# Allegro board NightIoT_uBus_Conect_ESP8266_V100_PCB.brd
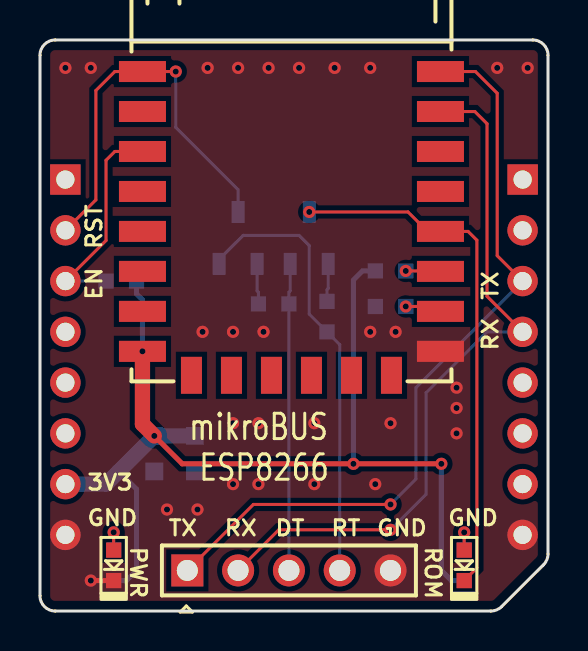
[diagram p0: board, top side]
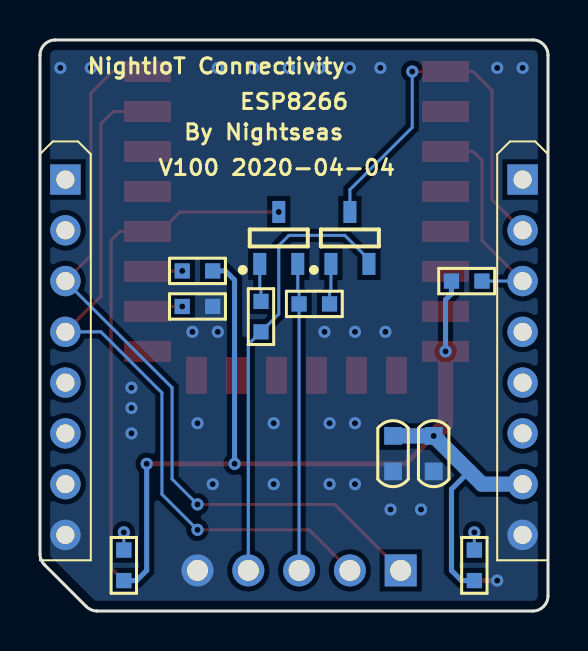
[diagram p1: board, bottom side, seen from below]

Outline 25.4 x 28.57 mm; copper layers: TOP, BOTTOM. Coordinates in mm from the lower left corner of the outline.
Outline path: 0,27.81 0,0.76 arc(0.22,0.22) 0.76,0 22.54,0 arc(22.84,0.06) 23.08,0.22 25.18,2.32 arc(25.34,2.56) 25.4,2.86 25.4,27.81 arc(25.18,28.35) 24.64,28.57 0.76,28.57 arc(0.22,28.35) 0,27.81

## Design rules (mm)
net group DTR: nets DTR N1533008
net group RTS: nets N1533004 RTS

## Placement (name value [footprint] x y rotation side)
C7  1uF  [C0603]  7.75 7.87 180 bottom
C8  0.1uF  [C0603]  5.71 7.87 180 bottom
J1  uBUS_CON_A  [SIP8]  1.27 21.59 180 bottom
J2  uBUS_CON_B  [SIP8]  24.13 21.59 180 bottom
J3  ISP CON  [SIP5]  7.37 2.03 0 top
LD2  BLUE  [LED0603]  21.21 3.05 270 top
LD3  GRN  [LED0603]  3.68 3.05 270 top
Q1  NPN_9013  [SOT23]  13.46 18.67 90 bottom
Q2  NPN_9013  [SOT23]  9.91 18.67 90 bottom
R6  10K  [R0603]  4.83 16.51 180 bottom
R7  10K  [R0603]  16.76 17.02 0 bottom
R8  10K  [R0603]  16.76 15.24 0 bottom
R9  10K  [R0603]  14.35 15.49 270 bottom
R10  1K  [R0603]  21.21 1.52 90 bottom
R11  10K  [R0603]  10.92 15.37 0 bottom
R12  560R  [R0603]  3.68 1.52 90 bottom
U3  -  [ESP12F]  12.57 23.5 0 top

## Library data of the parts
C7 = CAP_CE_0603: signal model: DEFAULT_CAPACITOR_100000pF_2_1
C8 = CAP_CE_0603: signal model: DEFAULT_CAPACITOR_47pF_2_1
J1 J2 = HEADER 8: User Part Number: ***
J3 = HEADER 5
LD2 LD3 = LED_0805
Q1 Q2 = NPN_9013
R6 R7 = R
R8 R9 = R: signal model: DEFAULT_RESISTOR_510OHM_2_1
R10-R12 = R: signal model: DEFAULT_RESISTOR_4700OHM_2_1
U3 = ESP12F

## Footprints (pads in the part's own frame, mm; a bottom-side part is the same pattern mirrored in y, then rotated)
C0603
  rect 0.889x0.889 smd: 1(0,0.889) 2(0,-0.889)
ESP12F
  rect 2.35x1.05 smd: 1(-7.45,3.5) 2(-7.45,1.5) 3(-7.45,-0.5) 4(-7.45,-2.5) 5(-7.45,-4.5) 6(-7.45,-6.5) 7(-7.45,-8.5) 8(-7.45,-10.5) 15(7.45,-10.5) 16(7.45,-8.5) 17(7.45,-6.5) 18(7.45,-4.5) 19(7.45,-2.5) 20(7.45,-0.5) 21(7.45,1.5) 22(7.45,3.5)
  rect 1.05x1.85 smd: 9(-5,-11.7) 10(-3,-11.7) 11(-1,-11.7) 12(1,-11.7) 13(3,-11.7) 14(5,-11.7)
LED0603
  rect 0.762x0.762 smd: 1(0,0) 2(1.524,0)
R0603
  rect 0.762x0.762 smd: 1(0,0) 2(1.524,0)
SIP5
  rect 1.6x1.6 hole 1.05: 1(0,0)
  round 1.6 hole 1.05: 2(2.54,0) 3(5.08,0) 4(7.62,0) 5(10.16,0)
SIP8
  rect 1.52x1.52 hole 0.91: 1(0,0)
  round 1.52 hole 0.91: 2(0,-2.54) 3(0,-5.08) 4(0,-7.62) 5(0,-10.16) 6(0,-12.7) 7(0,-15.24) 8(0,-17.78)
SOT23
  rect 1.1x0.65 smd: 1(-1.3,0.95) 2(-1.3,-0.95) 3(1.3,0)

## Nets
GND: C7.2 C8.2 J1.8 J2.8 J3.5 LD3.2(CATHODE) R8.1 U3.15(GND)
VDD3V3: C7.1 C8.1 J1.7 R6.1 R7.1 R10.1 R12.1 U3.8(VDD)
CH_PD: J1.3 R6.2 U3.3(EN)
DTR: J3.3 Q1.2(EMITTER) R11.2
IO0: LD2.2(CATHODE) Q1.3(COLLECTOR) U3.18(IO0/FLASH)
IO2: R7.2 U3.17(IO2/TXD1/SDA)
IO15: R8.2 U3.16(IO15/MTDO/HSPI_CS/RTS0/TXD2)
RST#: J1.2 Q2.3(COLLECTOR) U3.1(RST#)
RTS: J3.4 Q2.2(EMITTER) R9.2
UART_RX: J2.4 J3.2 U3.21(IO3/RXD0)
UART_TX: J2.3 J3.1 U3.22(IO1/TXD0)
N1533004: Q1.1(BASE) R9.1
N1533008: Q2.1(BASE) R11.1
N1536645: LD2.1(ANODE) R10.2
N1536681: LD3.1(ANODE) R12.2

Pads without a net: J1 1 4 5 6; J2 1 2 5 6 7; U3 2 4 5 6 7 9 10 11 12 13 14 19 20

## Via types
v1: diameter 0.61, hole 0.305, TOP to BOTTOM, 41 vias

## Routing (per net, layer and track width the routed paths; a pad name or vN(x,y) marks a point on that pad's centre or on a via; arc(x,y) is an arc through that point)
GND: length 1.1
  TOP w0.254: LD3.2 v1(2.54,1.52)
  vias: v1(1.27,27.18) v1(2.54,27.18) v1(6.35,5.08) v1(7.87,5.08) v1(8.13,13.97) v1(8.38,27.18) v1(9.65,13.97) v1(9.65,9.4) v1(9.65,6.35) v1(9.91,27.18) v1(10.92,9.4) v1(10.92,6.35) v1(11.18,13.97) v1(11.43,27.18) v1(12.95,27.18) v1(13.72,9.4) v1(13.72,6.35) v1(14.73,27.18) v1(16.51,27.18) v1(16.51,13.97) v1(16.76,6.35) v1(17.53,9.4) v1(17.78,13.97) v1(20.83,11.18) v1(20.83,10.16) v1(20.83,8.89) v1(22.86,27.18) v1(24.38,27.18)
VDD3V3: length 54.4
  TOP w0.254: v1(5.71,8.76) 7.11,7.37 v1(15.67,7.37) v1(20.07,7.37)
  TOP w0.762: v1(5.71,8.76) 5.12,9.36 v1(5.12,12.99)
  BOTTOM w0.254: v1(15.67,7.37) 15.67,16.56 16.13,17.02 R7.1 ; v1(20.07,7.37) 20.07,2.03 20.57,1.52 R10.1 ; R12.1 4.32,1.52 4.83,2.03 4.83,6.1 3.94,6.99 ; v1(5.12,12.99) 5.12,15.58 4.83,15.87 R6.1
  BOTTOM w0.762: J1.7 3.3,6.35 v1(5.71,8.76) C7.1
CH_PD: length 10.9
  TOP w0.152: U3.3 3.74,22.99 3.3,22.56 3.3,18.54 J1.3
  BOTTOM w0.152: J1.3 R6.2
DTR: length 15.4
  BOTTOM w0.152: J3.3 R11.2 12.45,15.95 12.51,16.02 Q1.2
IO0: length 26.3
  TOP w0.152: v1(13.46,19.97) 18.4,19.97 19.37,18.99 U3.18 21.4,18.99 21.84,18.56 21.84,2.16 LD2.2
IO2: length 1.7
  TOP w0.152: v1(18.29,17.02) 20,17.02 U3.17
IO15: length 1.8
  TOP w0.152: U3.16 19.78,15.24 v1(18.29,15.24)
RST#: length 20.3
  TOP w0.152: J1.2 2.79,20.57 2.79,26.05 3.74,27 U3.1 v1(6.79,27)
  BOTTOM w0.152: Q2.3 9.91,21.08 6.79,24.2 v1(6.79,27)
RTS: length 22.3
  BOTTOM w0.152: Q2.2 8.96,17.59 10.16,18.8 12.95,18.8 13.46,18.29 13.46,14.86 R9.2 14.99,13.34 J3.4
UART_RX: length 35.9
  TOP w0.152: J2.4 22.35,15.75 22.35,24.38 21.74,25 U3.21 ; J3.2 11.94,4.06 v1(17.53,4.06)
  BOTTOM w0.152: v1(17.53,4.06) 19.3,5.84 19.3,10.92 22.35,13.97 J2.4
UART_TX: length 38.7
  TOP w0.152: v1(17.53,5.33) 10.67,5.33 J3.1 ; J2.3 22.86,17.78 22.86,25.91 21.77,27 U3.22
  BOTTOM w0.152: v1(17.53,5.33) 18.8,6.6 18.8,11.18 J2.3
N1533004: length 1.9
  BOTTOM w0.152: Q1.1 14.41,16.14 14.35,16.08 R9.1
N1533008: length 2
  BOTTOM w0.152: R11.1 10.92,15.95 10.86,16.02 Q2.1
N1536645: length 1.8
  TOP w0.152: LD2.1 v1(21.21,3.94)
  BOTTOM w0.152: v1(21.21,3.94) LD2.1
N1536681: length 1.8
  TOP w0.152: v1(3.68,3.94) LD3.1
  BOTTOM w0.152: LD3.1 v1(3.68,3.94)

## Copper pours and planes (outline as drawn; the poured copper is in the pictures)
GND on TOP: 0.76,0.51 0.58,0.58 0.51,0.76 0.51,27.81 0.58,27.99 0.76,28.07 24.64,28.07 24.82,27.99 24.89,27.81 24.89,2.86 24.87,2.76 24.82,2.68 22.72,0.58 22.64,0.53 22.54,0.51 ; 5 cut-outs
GND on BOTTOM: 0.76,0.51 0.58,0.58 0.51,0.76 0.51,27.81 0.58,27.99 0.76,28.07 24.64,28.07 24.82,27.99 24.89,27.81 24.89,2.86 24.87,2.76 24.82,2.68 22.72,0.58 22.64,0.53 22.54,0.51 ; 1 cut-out

## Text on the board
Ref Des/Silkscreen Bottom: ESP8266 | By Nightseas | V100 2020-04-04 | NightIoT Connectivity
Ref Des/Silkscreen Top: 3V3 | GND | TX | RX | DT | RT | RST | EN | PWR | ROM | mikroBUS | ESP8266
